# EAGLE board akabeacon_da14580 (EAGLE 7.2.0)
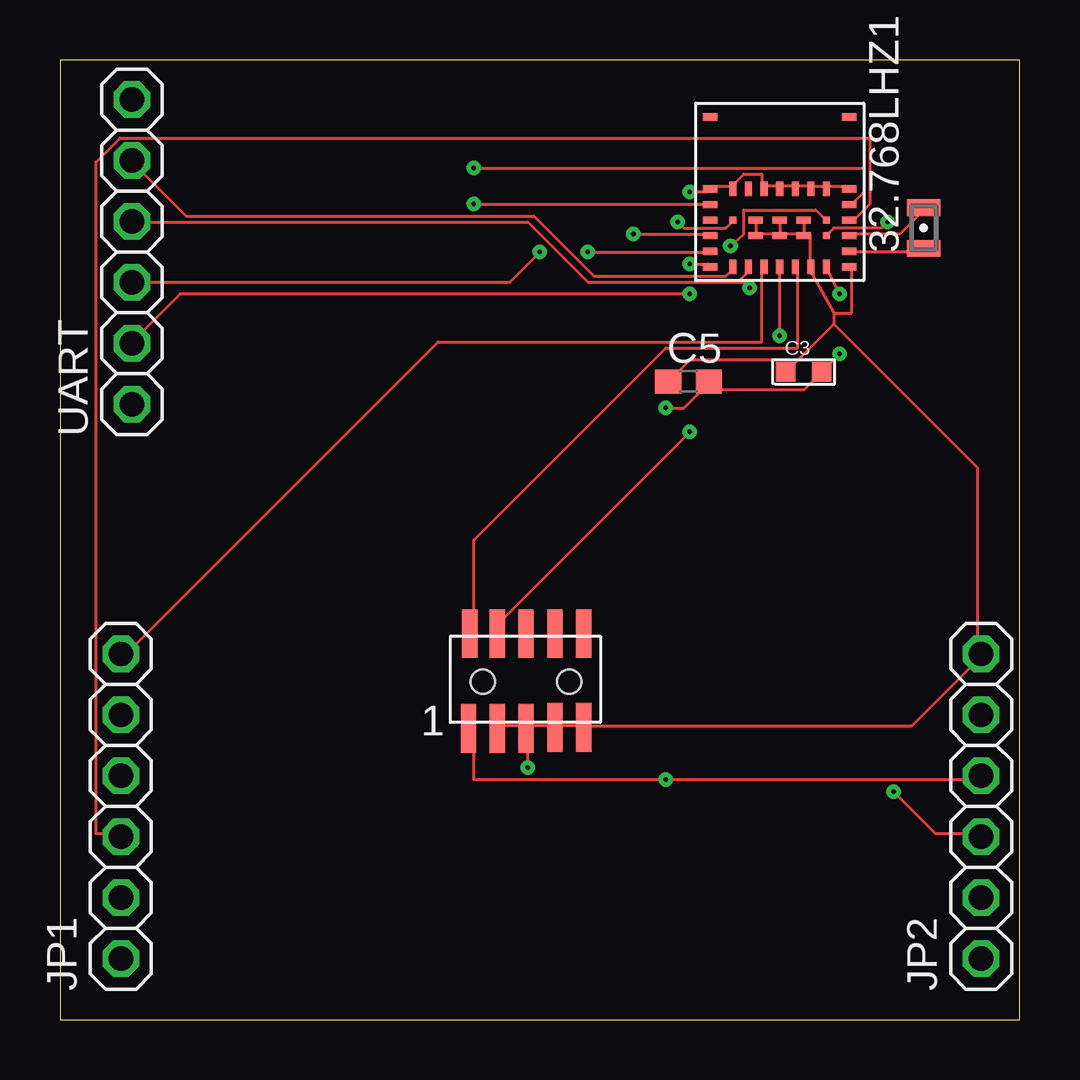
[diagram p0: board, top side]
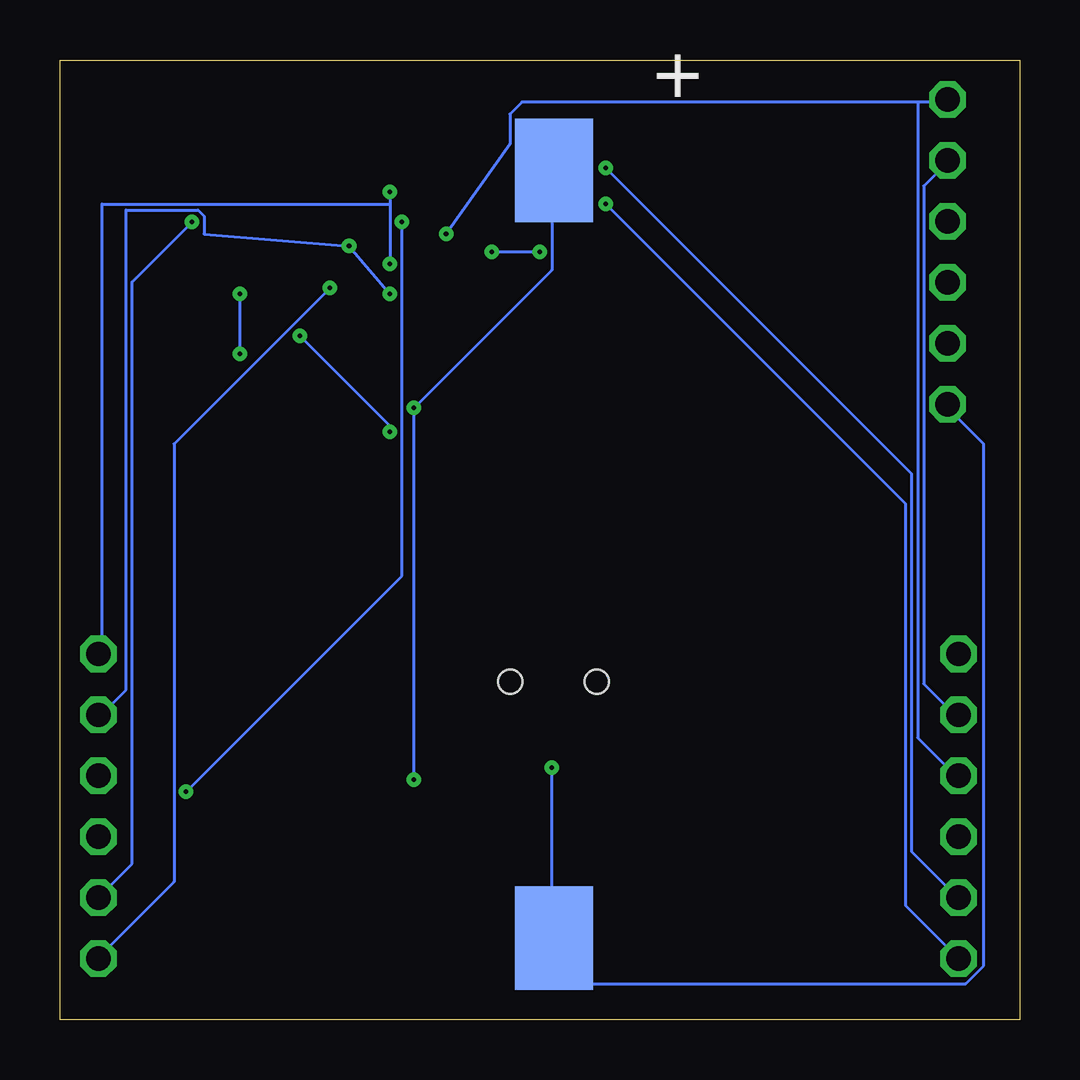
[diagram p1: board, bottom side, seen from below]

Size 40 x 40 mm. Coordinates in mm from the lower left corner, seen from the top.
Outline: 0,0 40,0 40,40 0,40 0,0
Copper layers (1*16): Top 0.035mm / dielectric 1.5mm / Bottom 0.035mm
Design rules "default *": minimum track width 5mil, minimum drill 8mil, track to track 4mil, track to pad 4mil, pad to pad 4mil, via to via 4mil, smd to smd 4mil, copper to edge 20mil, drill to drill 4mil, minimum pad ring 10mil, minimum via ring 8mil, stop-mask expansion 4mil, vias tented up to drill 0mil, thermal gap 10mil

## Footprints (pad centres in the part's own frame; a part is rotated, then mirrored left to right if it is on the bottom)
FC-12M = smd 0.7 x 1.4: 1 -0.85,0; 2 0.85,0
0603 = smd 0.8 x 0.8: 1 -0.75,0; 2 0.75,0
C0603 = smd 1.1 x 1: 1 -0.85,0; 2 0.85,0
1X06 = drill 1.016 octagon: 1 -6.35,0; 2 -3.81,0; 3 -1.27,0; 4 1.27,0; 5 3.81,0; 6 6.35,0
MURATA_TYPEZY = smd 0.3 x 0.6: 1 -1.95,-1.625; 2 -1.3,-1.625; 3 -0.65,-1.625; 4 0,-1.625; 5 0.65,-1.625; 6 1.3,-1.625; 7 1.95,-1.625; 14 1.95,1.625; 15 1.3,1.625; 16 0.65,1.625; 17 0,1.625; 18 -0.65,1.625; 19 -1.3,1.625; 20 -1.95,1.625 | smd 0.6 x 0.3: 8 2.9,-1.625; 9 2.9,-0.975; 10 2.9,-0.325; 11 2.9,0.325; 12 2.9,0.975; 13 2.9,1.625; 21 -2.9,1.625; 22 -2.9,0.975; 23 -2.9,0.325; 24 -2.9,-0.325; 25 -2.9,-0.975; 26 -2.9,-1.625; 27 -1,-0.325; 28 0,-0.325; 29 1,-0.325; 32 1,0.325; 33 0,0.325; 34 -1,0.325; 36 2.9,4.625; 37 -2.9,4.625 | smd 0.3 x 0.3: 30 1.95,-0.325; 31 1.95,0.325; 35 -1.95,0.325
PIN-HEADER-SMT(1.27MM)2X5 = smd 0.635 x 2.032: 1 -2.4,-1.95; 2 -2.35,2; 3 -1.2,-1.95; 4 -1.2,2; 5 0,-1.95; 6 0,2; 7 1.2,-1.9; 8 1.2,2; 9 2.4,-1.9; 10 2.4,2 | hole 1: 1.8,0; -1.8,0
SMTU2450-BOTTOM-MINI = smd 3.251 x 4.318 bottom: P$_GND 0,-16; P$_VCC 0,16

## Placement (x,y rotation side)
32.768LHZ1  FC-12M  [FC-12M]  36,33 90 top
C3  2.2uf  [0603]  31,27 0 top
C5  0.1uf  [C0603]  26.2,26.6 0 top
JP1  [1X06]  2.54,8.89 90 top
JP2  [1X06]  38.4,8.89 90 top
U$1  MURATA-TYPEZY  [MURATA_TYPEZY]  30,33 0 top
U$2  PIN-HEADER-SMT(1.27MM)2X5  [PIN-HEADER-SMT(1.27MM)2X5]  19.43,14.08 0 top
U$3  SMTU2450-BOTTOM-MINI  [SMTU2450-BOTTOM-MINI]  19.4,19.4 0 top
UART  [1X06]  3,32 90 top

## Library data of the parts
32.768LHZ1 = crystal
C3 = GClue-Capacitor
C5 JP1 JP2 UART = adafruit
U$1 = GClueBT
U$2 U$3 = gclue

## Nets
+3V3: C3.2 C5.2 JP2.4 U$1.7 U$2.1 U$3.P$_VCC
+5V: JP2.5 U$1.31 UART.2
GND: C3.1 C5.1 JP2.6 U$1.6 U$1.8 U$1.13 U$1.14 U$1.15 U$1.16 U$1.17 U$1.18 U$1.20 U$1.21 U$1.26 U$1.27 U$1.28 U$1.29 U$1.32 U$1.33 U$1.34 U$2.3 U$2.5 U$2.7 U$2.9 U$3.P$_GND UART.1
P0_0: U$1.23
P0_1: JP1.1 U$1.22
P0_2: JP1.2 U$1.12
P0_3: JP1.3 U$1.11
P0_4: JP1.4 U$1.24 UART.6
P0_5: JP1.5 U$1.1 UART.5
P0_6: JP1.6 U$1.3
P0_7: JP2.1 U$1.2 UART.4
P1_0: JP2.3 U$1.35
P1_1: JP2.2 U$1.30
RST: U$1.25 UART.3
SWCLK: U$1.4 U$2.4
SWDIO: U$1.5 U$2.2
XTAL32KM: 32.768LHZ1.2 U$1.10
XTAL32KP: 32.768LHZ1.1 U$1.9

## Tracks (layer width: path | path; a pad name or v marks a point on that pad's centre or on a via)
+3V3  (via drill 0.2)
  Top 0.127: v32.5,30.25 32,31.25 U$1.7 | v32.5,27.75 C3.2 31,26.25 27.5,26.25 27.25,26.5 C5.2 27,26.5 26,25.5 v25.25,25.5 | U$2.1 17.25,12 17.25,10 v25.25,10 38.25,10 JP2.4
  Bottom 0.127: v32.5,27.75 v32.5,30.25 | U$3.P$_VCC 19.5,35.25 19.5,31.25 v25.25,25.5 v25.25,10
+5V  (via drill 0.2)
  Top 0.127: v27.95,32.25 28.5,32.75 28.5,33.75 31.5,33.75 32,33.25 U$1.31 | v26.25,30.25 5,30.25 3,28.25 UART.2
  Bottom 0.127: JP2.5 38.25,12.75 37.25,13.75 37.25,33.75 34.25,33.75 34,33.5 34,32.75 v27.95,32.25 v26.25,30.25
GND  (via drill 0.2)
  Top 0.127: U$1.34 29,32.75 | U$1.33 30,32.75 | 30,32.75 29,32.75 | 29,32.75 U$1.27 | U$1.32 31,32.75 | 31,32.75 31.25,32.75 31.25,31.5 U$1.6 31.25,31.25 32.25,29.45 | 32.25,29.45 33,29.45 33,31.25 U$1.8 | 32.25,29 30.75,27.5 | 30.75,27.5 C3.1 | 32.25,29.45 32.25,29 | C5.1 26.25,27.5 30.75,27.5 | 31,32.75 30,32.75 | 30,32.75 U$1.28 | 31,32.75 U$1.29 | 30,34.75 29.25,34.75 | 31.25,34.75 30.75,34.75 | 31.25,34.75 32,34.75 | 31.25,34.75 U$1.15 | 32,34.75 32.75,34.75 U$1.13 | 32,34.75 U$1.14 | 30.75,34.75 30,34.75 | 30,34.75 U$1.17 | 30.75,34.75 U$1.16 | v26.25,31.5 27,31.5 U$1.26 | v26.25,34.5 27,34.5 U$1.21 27.25,34.75 28,34.75 | 29.25,34.75 29.25,35.25 28.5,35.25 28,34.75 | 29.25,34.75 U$1.18 | 28,34.75 U$1.20 | U$2.3 18.25,12.25 19.25,12.25 U$2.5 | U$2.5 19.5,12.25 20.5,12.25 U$2.7 20.75,12.25 21.75,12.25 U$2.9 22,12.25 35.5,12.25 38.25,15 JP2.6 38.25,15.25 38.25,23 32.25,29 | v19.5,10.5 19.5,12 U$2.5
  Bottom 0.127: v26.25,34.5 26.25,34 | 26.25,34 v26.25,31.5 | 26.25,34 38.25,34 38.25,15.25 JP2.6 | UART.1 3,25.5 1.5,24 1.5,2.25 2.25,1.5 19.25,1.5 19.25,3.25 U$3.P$_GND 19.5,3.5 v19.5,10.5
P0_1  (via drill 0.2)
  Top 0.127: v17.25,34 27,34 U$1.22
  Bottom 0.127: v17.25,34 4.75,21.5 4.75,4.75 JP1.1
P0_2  (via drill 0.2)
  Top 0.127: v17.25,35.5 33.5,35.5 33.5,34.5 33,34 U$1.12
  Bottom 0.127: v17.25,35.5 4.5,22.75 4.5,7 2.75,5.25 JP1.2
P0_3
  Top 0.127: U$1.11 33,33.25 33.75,34 33.75,36.75 2.5,36.75 1.5,35.75 1.5,7.75 2.5,7.75 JP1.3
P0_4  (via drill 0.2)
  Top 0.127: v23.9,32.75 27,32.75 U$1.24
  Bottom 0.127: v23.9,32.75 21.25,36.5 21.25,37.75 20.75,38.25 4.25,38.25 | 4.25,38.25 3,38.25 UART.6 | 4.25,38.25 4.25,11.75 2.75,10.25 JP1.4
P0_5
  Top 0.127: U$1.1 28,31.25 27.75,31 22.25,31 19.75,33.5 5.25,33.5 3,35.75 UART.5
  Bottom 0.127: JP1.5 2.75,12.75 4,14 4,34.75 3,35.75 UART.5
P0_6
  Top 0.127: U$1.3 29.25,31.25 29.25,28.25 15.75,28.25 2.75,15.25 JP1.6
P0_7  (via drill 0.2)
  Top 0.127: 28.25,30.75 28.75,31.25 U$1.2 | 28.25,30.75 22,30.75 19.5,33.25 3,33.25 UART.4 | v28.75,30.5 28.5,30.75 28.25,30.75
  Bottom 0.127: v28.75,30.5 35.25,24 35.25,5.75 38.25,2.75 JP2.1
P1_0  (via drill 0.2)
  Top 0.127: v25.75,33.25 26,33 27.75,33 28,33.25 U$1.35 | v34.75,9.5 36.5,7.75 38.25,7.75 JP2.3
  Bottom 0.127: v25.75,33.25 25.75,18.5 v34.75,9.5
P1_1  (via drill 0.2)
  Top 0.127: v34.5,33.25 34.25,33 32.25,33 32,32.75 U$1.30
  Bottom 0.127: v34.5,33.25 37,30.75 37,6.5 38.25,5.25 JP2.2
RST  (via drill 0.2)
  Top 0.127: v22,32 27,32 U$1.25 | v20,32 18.75,30.75 3,30.75 UART.3
  Bottom 0.127: v20,32 v22,32
SWCLK  (via drill 0.2)
  Top 0.127: v30,28.5 U$1.4 | v26.25,24.5 18,16.25 U$2.4
  Bottom 0.127: v30,28.5 26.25,24.75 v26.25,24.5
SWDIO
  Top 0.127: U$1.5 30.75,31.25 30.75,28 25.25,28 17.25,20 17.25,16.25 U$2.2
XTAL32KM
  Top 0.127: U$1.10 33,32.75 35,32.75 36,33.75 32.768LHZ1.2
XTAL32KP
  Top 0.127: U$1.9 33,32 36,32 32.768LHZ1.1